# Altium PCB batpcb-env.PcbDoc
Units mm, origin at the board's own origin, x right, y up, seen from the top; angles counter-clockwise.
Board outline 54 x 11.5 mm, 2 copper layers (Top Layer, Bottom Layer); 7 components, 7 nets, 25 pads, 13 vias.
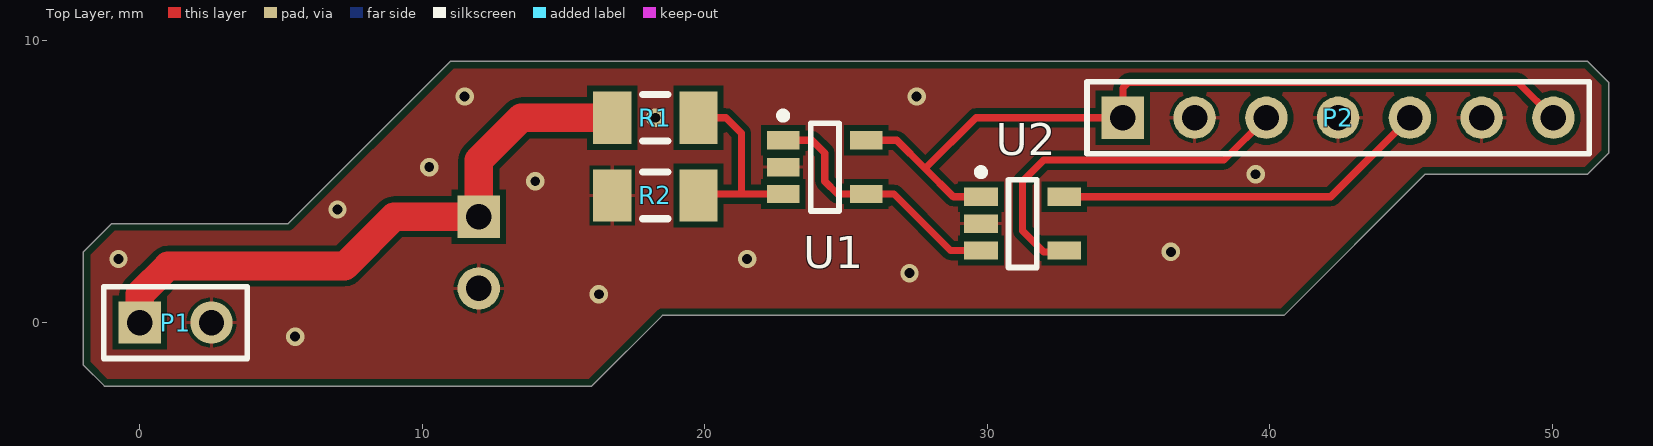
[diagram p0: Top Layer view]
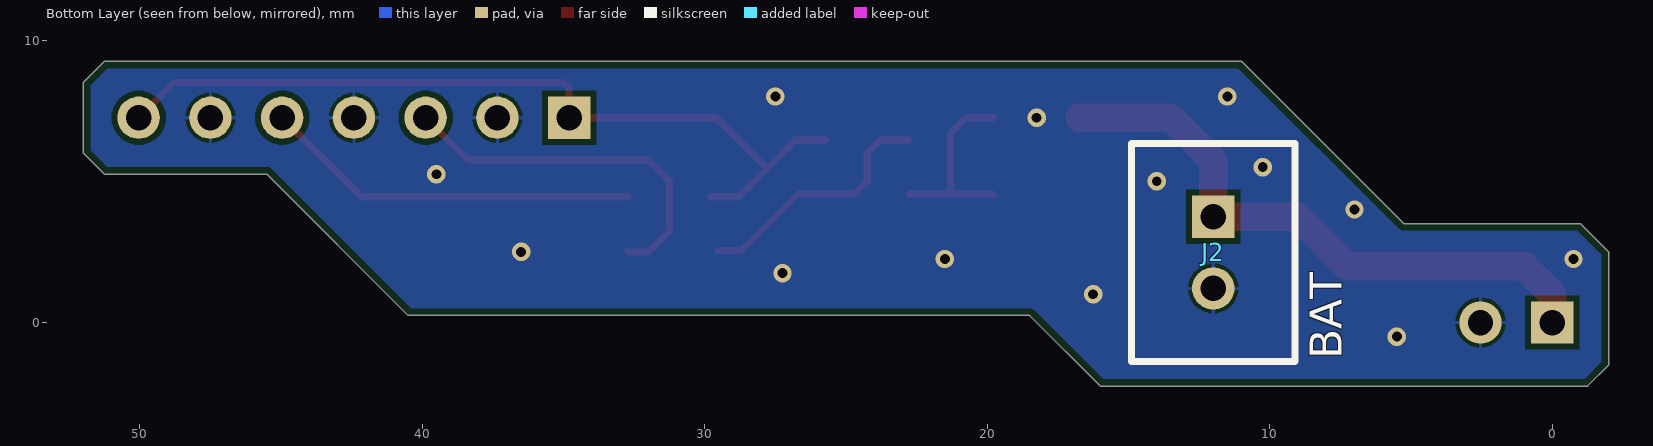
[diagram p1: Bottom Layer view, seen from below]

## Layer stack, top to bottom
Top Solder: solder mask 0.0102, Solder Resist, Dk 3.5
Top Layer: signal copper 0.0356
Dielectric 1: dielectric 0.32, FR-4, Dk 4.8
Bottom Layer: signal copper 0.0356
Bottom Solder: solder mask 0.0102, Solder Resist, Dk 3.5

## Board outline
-2,-1.5 -2,2.5 -1,3.5 5.25,3.5 11,9.25 51.25,9.25 52,8.5 52,6 51.25,5.25 45.5,5.25 40.5,0.25 18.5,0.25 16,-2.25 -1.25,-2.25

## Design rules (kind name [scope] priority, off if disabled: settings)
BoardOutlineClearance [All] p1: gap=0.254 ignorepadtopadclearanceinfootprint=FALSE
Clearance "GND PLANE" [InNet('GND') vs InNet('SIG')] p1: gap=0.508 ignorepadtopadclearanceinfootprint=TRUE
Clearance [All] p2: gap=0.203 ignorepadtopadclearanceinfootprint=TRUE except(0.279: Arc-Hole Track-Hole SMDPad-Hole THPad-Hole Via-Hole Fill-Hole Poly-Hole Region-Hole Text-Hole)
ComponentClearance [All] p1: gap=0.127 collisioncheckmode=3 verticalgap=0.127 showdistances=TRUE
DiffPairsRouting [All] p1: maxlimit=0.254 minlimit=0.127 mostfreqgap=0.127 toplayer_minwidth=0.127 toplayer_maxwidth=25.4 toplayer_prefwidth=0.127 bottomlayer_minwidth=0.127 bottomlayer_maxwidth=25.4 bottomlayer_prefwidth=0.127 maxuncoupledlength=12.7
Height [All] p1: minheight=0 maxheight=1816.048 prefheight=12.7
HoleSize [All] p1: absolutevalues=TRUE maxlimit=6.1 minlimit=0.3 maxpercent=80.000 minpercent=20.000
HoleToHoleClearance [All] p1: gap=0.6 allowstackedmicrovias=FALSE
MinimumAnnularRing VIaAnnularRing [IsVia] p1: minimumring=0.145
MinimumAnnularRing [All] p2: minimumring=0.18
PlaneClearance [All] p1: clearance=0.127
PlaneConnect PlaneConnectPowerPads [InPadClass('PowerPads')] p1: planeconnectstyle=Direct reliefexpansion=0.508 reliefentries=4 reliefconductorwidth=0.254 reliefairgap=0.254
PlaneConnect [All] p2: pad.planeconnectstyle=Relief pad.reliefexpansion=0.3 pad.reliefentries=4 pad.reliefconductorwidth=0.127 pad.reliefairgap=0.127 via.planeconnectstyle=Direct via.reliefexpansion=0.3 via.reliefentries=4 via.reliefconductorwidth=0.127 via.reliefairgap=0.127
PolygonConnect PolygonConnectPowerPads [All vs (InPadClass('PowerPads'))] p1: connectstyle=Direct reliefconductorwidth=0.254 reliefentries=4 polygonreliefangle="90 Angle" airgapwidth=0.254
PolygonConnect [All] p2: thpad.connectstyle=Relief thpad.reliefconductorwidth=0.127 thpad.reliefentries=4 thpad.polygonreliefangle="90 Angle" thpad.airgapwidth=0.127 smdpad.connectstyle=Relief smdpad.reliefconductorwidth=0.127 smdpad.reliefentries=4 smdpad.polygonreliefangle="90 Angle" smdpad.airgapwidth=0.127 via.connectstyle=Direct via.reliefconductorwidth=0.127 via.reliefentries=4 via.polygonreliefangle="90 Angle" via.airgapwidth=0.127
RoomDefinition batsch-env [InComponentClass('batsch-env')] p1: confinementstyle=ConfineIn formatcopy=TRUE lockcomponents=FALSE outline -81,-85 132.75,-85 132.75,101.5 -81,101.5
RoutingVias [All] p1: holewidth=0.35 width=0.65 viastyle="Through Hole" minholewidth=0.35 minwidth=0.65 maxholewidth=2 maxwidth=2
SilkToSilkClearance [All] p1: silktosilkclearance=0
SilkToSolderMaskClearance [IsPad] p1: minsilkscreentomaskgap=0.16 clearancetoexposedcopper=TRUE
SolderMaskExpansion [All] p1: expansion=0.075 istentingtop=FALSE
UnRoutedNet [All] p1: checkbadconnections=TRUE
Width [All] p1: maxlimit=25.4 minlimit=0.203 preferedwidth=0.254 minimp=50.000000 maximp=50.000000 favimp=50.000000
20 further rules are at their usual default settings.

## Components (designator, comment, footprint, x,y, rotation, side; value= is the part's Value field where it differs from the comment)
J2 "JST-PH" JST-PH 12,3.75 r270 bottom
P1 "Header 2" HDR1X2 0,0 r0 top
P2 "Header 7" HDR1X7 34.8,7.25 r0 top
R1 "Res1" 1206 18.25,7.25 r0 top value=10M
R2 "Res1" 1206 18.25,4.5 r180 top value=10M
U1 "TC75S102F,LF(CT" "OPAMP TOSHIBA" 24.25,5.5 r0 top
U2 "ADC" "I2C SOT23" 31.25,3.5 r0 top

## Footprints (in the part's own frame and the unit in brackets; to place one, negate y for a bottom-side part, rotate by r counter-clockwise, add the part's x,y. Pads: shape width x height; smd on the part's side, far side on the other; paste and mask are expansions set on the pad)
1206 [mm] "Chip Resistor, 2-Leads, Body 3.10x1.60mm, IPC Low Density"
  rect 1.35x1.85 smd: 1(-1.525,0) 2(1.525,0)
  silkscreen extent -0.45,-0.82 0.45,0.82, body extent -1.6,-0.85 1.6,0.85, height 0.65
HDR1X2 [mm] "Connector; Header; 2 Position"
  rect 1.5x1.5 hole 0.9: 1(0,0)
  round 1.5 hole 0.9: 2(2.54,0)
  silkscreen extent -1.27,-1.27 3.81,1.27
HDR1X7 [mm] "Connector; Header; 7 Position"
  rect 1.5x1.5 hole 0.9: 1(0,0)
  round 1.5 hole 0.9: 2(2.54,0) 3(5.08,0) 4(7.62,0) 5(10.16,0) 6(12.7,0) 7(15.24,0)
  silkscreen extent -1.27,-1.27 16.51,1.27
"I2C SOT23" [mm]
  rect 1.2x0.65 smd: 1(-1.475,0.95) 2(-1.475,0) 3(-1.475,-0.95) 4(1.475,-0.95) 5(1.475,0.95)
  silkscreen extent -1.6,-1.55 0.5,1.95, body extent -0.88,-1.55 0.87,1.55, height 1.45
JST-PH [mm]
  rect 1.5x1.5 hole 0.9: 1(0,0)
  round 1.5 hole 0.9: 2(2.54,0)
  silkscreen extent -2.59,-2.9 5.13,2.9
"OPAMP TOSHIBA" [mm] "SOT23, 5-Leads, Body 2.90x2.75mm, Pitch 0.95mm, IPC Low Density"
  rect 1.15x0.65 smd: 1(-1.475,0.95) 2(-1.475,0) 3(-1.475,-0.95) 4(1.475,-0.95) 5(1.475,0.95)
  silkscreen extent -1.6,-1.55 0.5,1.95, body extent -0.9,-1.55 0.9,1.55, height 1.4

## Part data
J2: "Input/Output"
P1: "Header, 2-Pin", LatestRevisionDate=17-Jul-2002, LatestRevisionNote="Re-released for DXP Platform.", Publisher="Altium Limited"
P2: "Header, 7-Pin", LatestRevisionDate=17-Jul-2002, LatestRevisionNote="Re-released for DXP Platform.", Publisher="Altium Limited"
R1 R2: library part "resistor 10M", "Resistor", Tolerance=10%, LatestRevisionDate=17-Jul-2002, LatestRevisionNote="Re-released for DXP Platform.", PackageDescription="Axial Device, Thru-Hole; 2 Leads; 0.3 in Pin Spacing", PackageReference=AXIAL-0.3, Published=8-Jun-2000, Publisher="Altium Limited"
U1: "Op Amp Single Ultra Low Current Amplifier 5.5V 5-Pin SMV T/R", Manufacturer=Toshiba, Supplier Part Number 1=264-TC75S102FLF(CT-ND, Category="Amplifiers - Op Amps, Buffer, Instrumentation", Manufacturer Part Number=TC75S102F,LF(CT, Pricing 1="1=0.47000, 10=0.39800, 25=0.37160, 100=0.29740, 250=0.27616, 500=0.23366, 1000=0.18056 (USD)", RoHS=No, Stock 1=4549, Supplier 1=Digi-Key
U2: library part MCP3021A0T-E/OT, "1-Channel Single ADC SAR 22.3ksps 10-bit Serial Automotive 5-Pin SOT-23 T/R", Case/Package=SOT-23, Manufacturer=Microchip, Max Operating Temperature=125°C, Max Supply Voltage=5.5V, Min Operating Temperature=-40°C, Min Supply Voltage=2.7V, Operating Supply Voltage=5V, Supplier Part Number 1=MCP3021A0T-E/OTCT-ND, Category="Analog to Digital Converters (ADCs)", ComponentLink1Description=https://datasheet.ciiva.com/1255/21805a-1255936.pdf?src-supplier=Digi-Key, ComponentLink1URL=https://datasheet.ciiva.com/1255/21805a-1255936.pdf?src-supplier=Digi-Key, ComponentLink2Description=https://datasheet.ciiva.com/26937/getdatasheetpartid-766115-26937716.pdf?src-supplier=Verical, ComponentLink2URL=https://datasheet.ciiva.com/26937/getdatasheetpartid-766115-26937716.pdf?src-supplier=Verical, ComponentLink3Description=https://datasheet.ciiva.com/1255/21805a-1255934.pdf?src-supplier=Digi-Key, ComponentLink3URL=https://datasheet.ciiva.com/1255/21805a-1255934.pdf?src-supplier=Digi-Key, ComponentLink4Description=https://datasheet.ciiva.com/1255/21805a-1255935.pdf?src-supplier=Digi-Key, ComponentLink4URL=https://datasheet.ciiva.com/1255/21805a-1255935.pdf?src-supplier=Digi-Key, ComponentLink5Description=https://datasheet.ciiva.com/16625/21805a-16625790.pdf?src-supplier=Avnet+Europe, ComponentLink5URL=https://datasheet.ciiva.com/16625/21805a-16625790.pdf?src-supplier=Avnet+Europe, ComponentLink6Description=https://datasheet.ciiva.com/16454/filehandler-aspxddocname-en011709-16454205.pdf?src-supplier=Future+Electronics, ComponentLink6URL=https://datasheet.ciiva.com/16454/filehandler-aspxddocname-en011709-16454205.pdf?src-supplier=Future+Electronics, Conversion Rate=22.3KS/s, Input Type=SINGLE-ENDED, Integral Nonlinearity (INL)=1LSB, Interface=I2C,Serial, Lead Free="Lead Free", Manufacturer Part Number=MCP3021A0T-E/OT, Mount="Surface Mount", Number of A/D Converters=1, Number of Analog Inputs=1, Number of Bits=10, Number of Channels=1, Number of Converters=1, Number of Elements=1, Number of Pins=5, Packaging="Tape and Reel", Polarity=Unipolar, Pricing 1="1=1.29000, 25=1.07080, 100=0.99000 (USD)", Radiation Hardening=No, Resolution=10b, RoHS=Yes, RoHS Compliant=Yes, Sampling Rate=22.3KS/s, Signal to Noise Ratio (SNR)=60dB, Stock 1=1856, Supplier 1=Digi-Key

## Via types
v1: diameter 0.65, hole 0.35, Top Layer to Bottom Layer, 13 vias

## Nets (pads, with @x,y where several pads share a name; then routed paths per layer and width w, separated by ;. In a path a pad name is that pad's centre, name@x,y a point inside that pad or via, vN(x,y) a via of type N, cw(c..) or ccw(c..) an arc to the next point about the centre after c; other vN are vias at no path point)
GND: J2.2 P1.2 P2.2 P2.4 P2.6 R2.2 U1.2 U2.2
  other v1: 5.5,-0.5 16.25,1 27.25,1.75 -0.75,2.25 21.5,2.25 36.5,2.5 7,4 14,5 39.5,5.25 10.25,5.5 18.25,7.25 11.5,8 27.5,8
NetR1_2: R1.2 R2.1 U1.3 | length 6.9
  Top Layer w0.254: R2.1 19.825,4.55 21.3,4.55 ; R1.2 20.75,7.25 21.3,6.7 21.3,4.55 ; U1.3 21.3,4.55
NetU1_1: U1.1 U1.4 U2.3 | length 9
  Top Layer w0.254: U1.1 23.8,6.45 24.25,6 24.25,5 24.7,4.55 U1.4 26.7,4.55 28.7,2.55 U2.3@29.525,2.55
SCL: P2.5 U2.5 | length 13.4
  Top Layer w0.254: U2.5 42.16,4.45 P2.5
SDA: P2.3 U2.4 | length 13.1
  Top Layer w0.254: U2.4 32.675,2.5 32,2.5 31.25,3.25 31.25,5 32,5.75 38.38,5.75 P2.3
Vbat: J2.1 P1.1 R1.1 | length 21.7
  Top Layer w1.016: P1.1@0.187,0.187 P1.1 0,1 1,2 7.25,2 9,3.75 J2.1 12,5.75 13.5,7.25 R1.1
VREG: P2.1 P2.7 U1.5 U2.1 | length 29.5
  Top Layer w0.254: U1.5 26.8,6.45 27.8,5.45 ; U2.1 28.8,4.45 27.8,5.45 ; P2.7 48.79,8.5 35,8.5 34.8,8.3 P2.1 29.6,7.25 27.8,5.45

## Polygon pours and split planes (outlines as drawn)
GND on Bottom Layer "GND-BOT" (solid, pour order 1): 11,9.25 5.25,3.5 -1,3.5 -2,2.5 -2,-1.5 -1.25,-2.25 16,-2.25 18.5,0.25 40.5,0.25 45.5,5.25 51.25,5.25 52,6 52,8.5 51.25,9.25
GND on Top Layer "GND" (solid, pour order 0): 11,9.25 5.25,3.5 -1,3.5 -2,2.5 -2,-1.5 -1.25,-2.25 16,-2.25 18.5,0.25 40.5,0.25 45.5,5.25 51.25,5.25 52,6 52,8.5 51.25,9.25

## Silkscreen, mask and mechanical layers (free items; w line width, h text height)
Bottom Overlay:
  text "BAT" at 7.453,-1.297 h1.14 r270
Board Outline:
  the board outline again, w0.025